# Altium PCB myESR.PcbDoc
Units mm, origin at the board's own origin, x right, y up, seen from the top; angles counter-clockwise.
Board outline 92.58 x 84.33 mm, 2 copper layers (Top Layer, Bottom Layer); 67 components, 49 nets, 231 pads, 4 vias.
Unrouted connection lines stored in the file: 1.
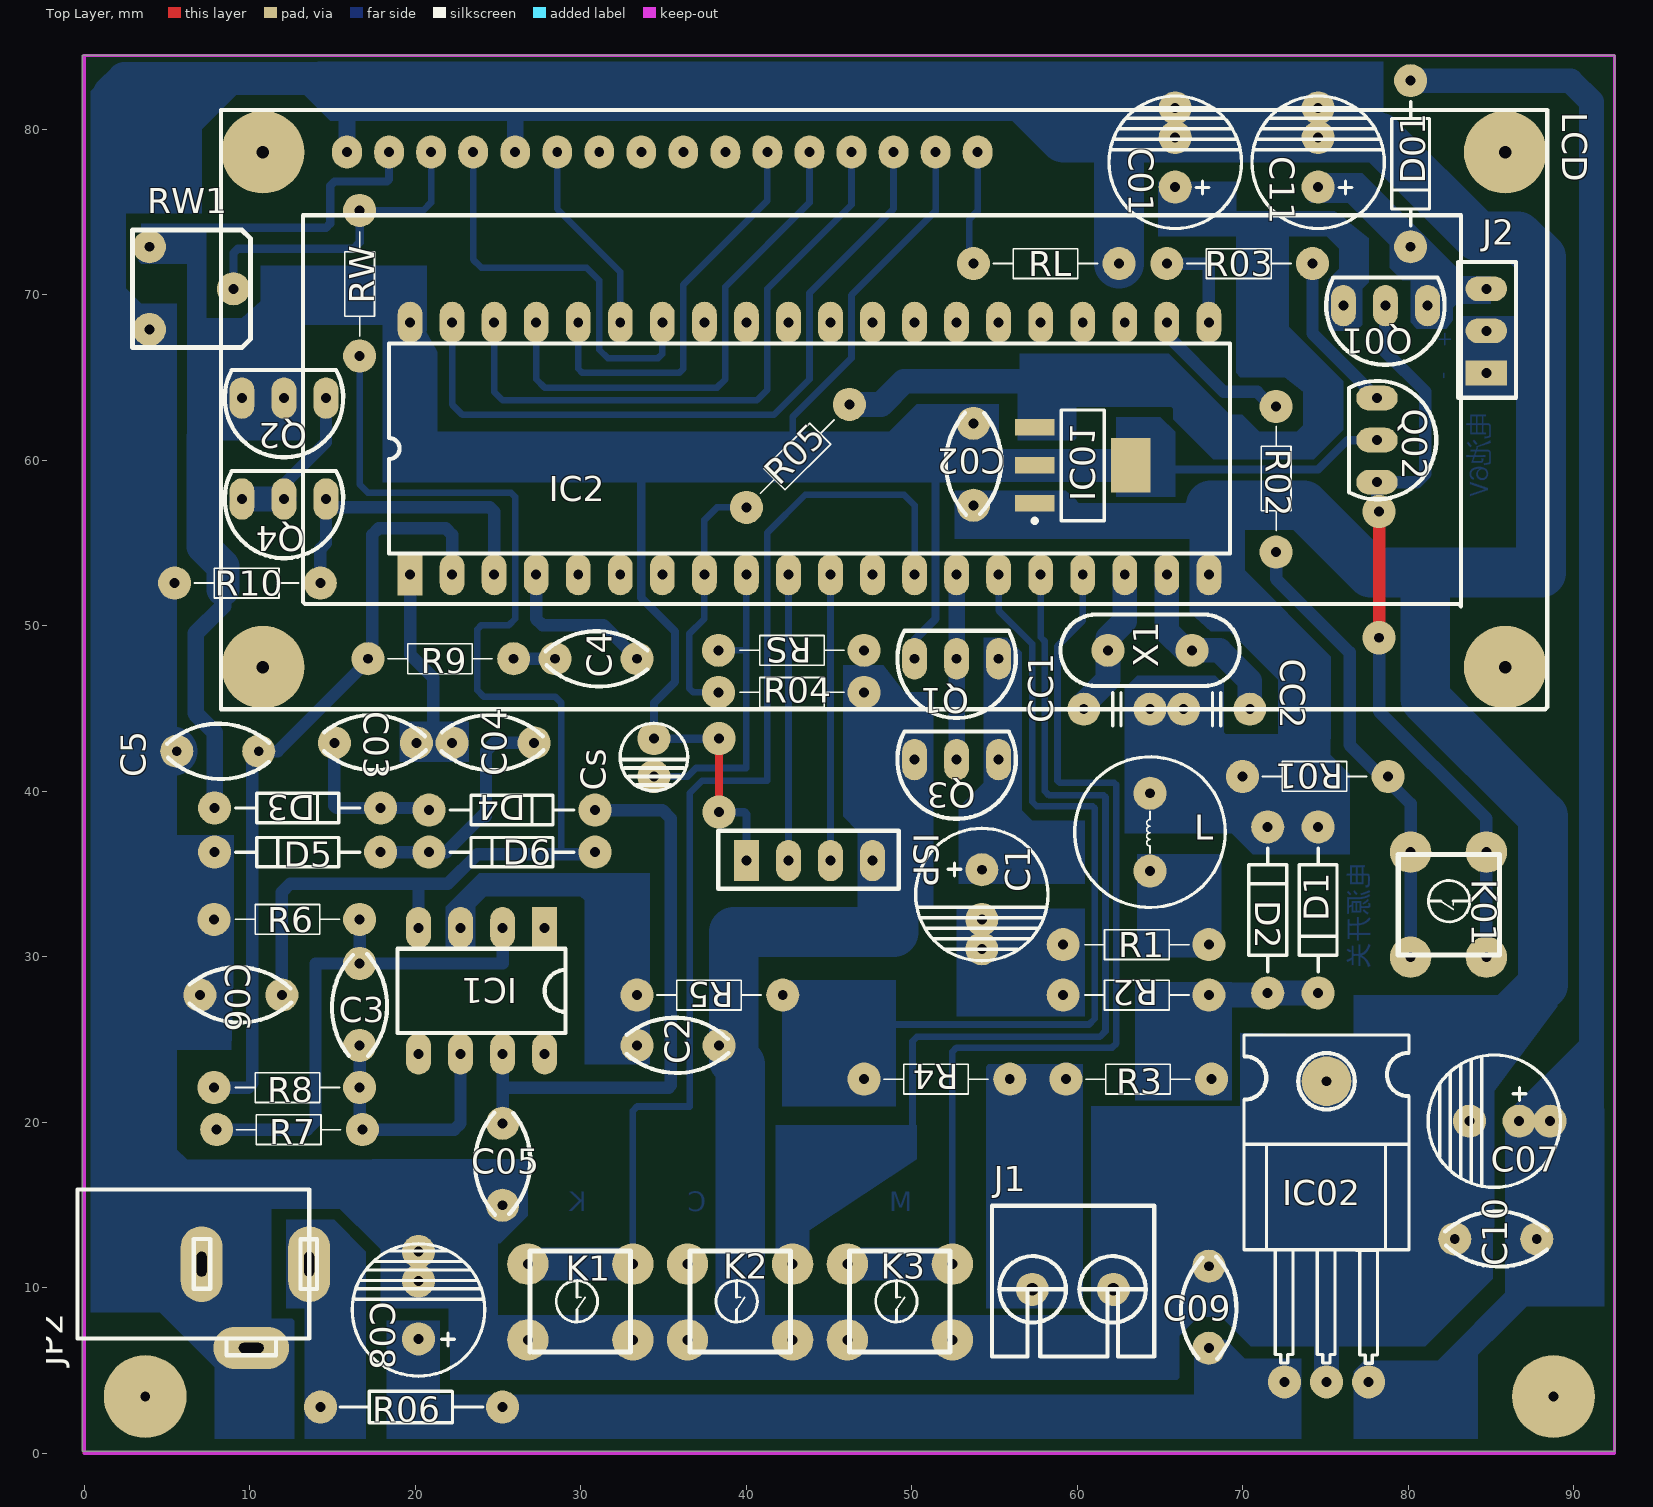
[diagram p0: Top Layer view]
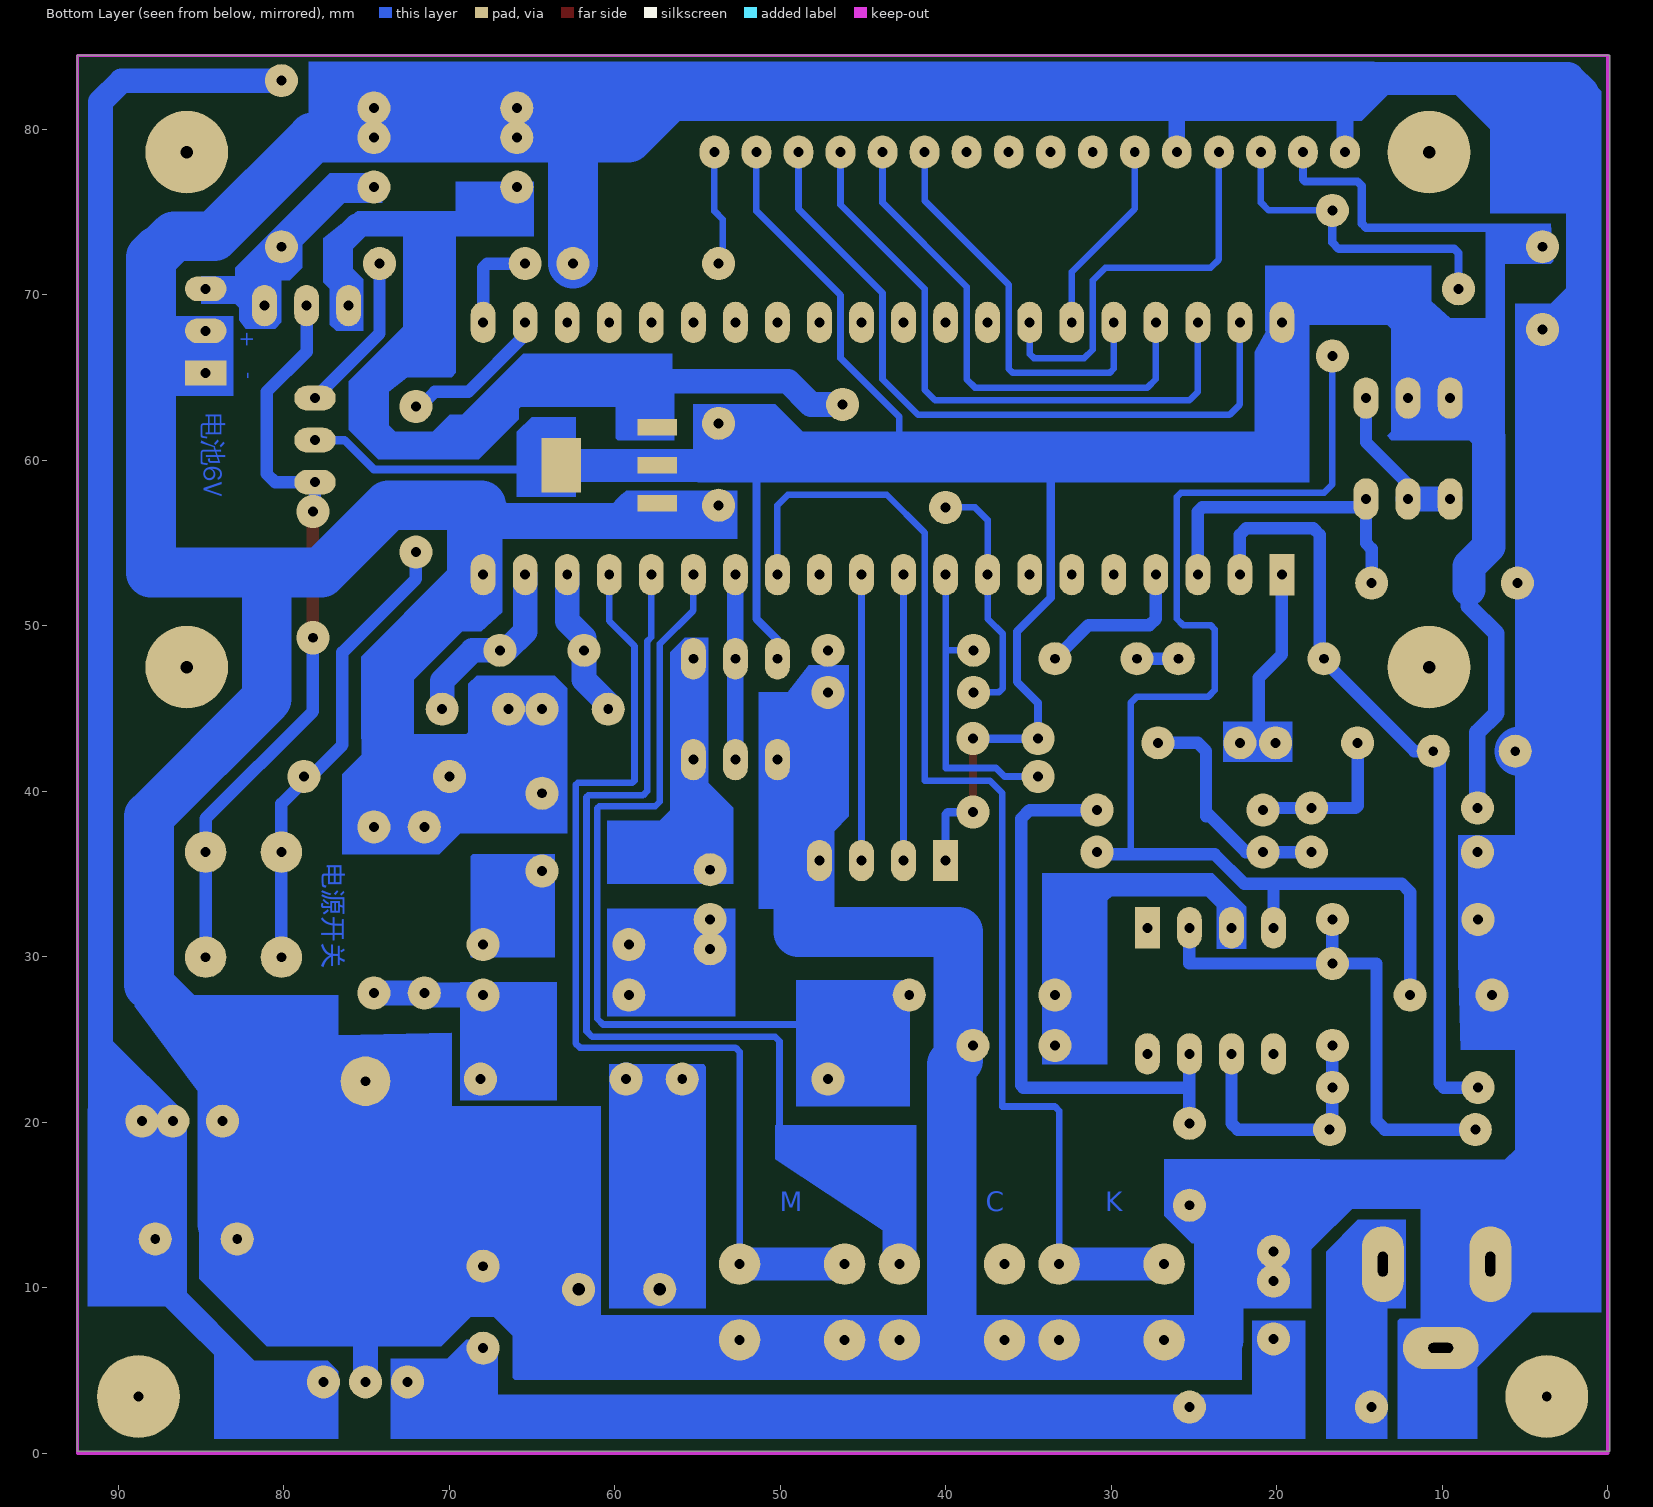
[diagram p1: Bottom Layer view, seen from below]

## Layer stack, top to bottom
Top Layer: signal copper 0.0356
Dielectric: dielectric 0.32, FR-4, Dk 4.8
Bottom Layer: signal copper 0.0356

## Board outline
-0.127,84.455 92.456,84.455 92.456,0.127 -0.127,0.127 -0.127,84.455

## Design rules (kind name [scope] priority, off if disabled: settings)
Clearance [All] p1: gap=0.254
ComponentClearance [All] p1: gap=0.254 collisioncheckmode=3 verticalgap=0.254
PolygonConnect [All] p1: connectstyle=Relief reliefconductorwidth=0.254 reliefentries=4 polygonreliefangle="90 Angle"
RoutingVias [All] p1: holewidth=0.6 width=2 viastyle="Through Hole" minholewidth=0.6 minwidth=2 maxholewidth=0.6 maxwidth=2
SolderMaskExpansion [All] p1: expansion=0.102
TestPointUsage [All] p1: valid=0 allowmultiple=FALSE
Testpoint [All] p1: side=15 testpointundercomponent=TRUE minsize=1.016 maxsize=2.54 preferedsize=1.524 minholesize=0 maxholesize=1.016 preferedholesize=0.813 testpointgrid=0.025 style=1023 order=0123456789
Width [All] p1: maxlimit=3 minlimit=0.254 preferedwidth=0.4
18 further rules are at their usual default settings.

## Components (designator, comment, footprint, x,y, rotation, side; value= is the part's Value field where it differs from the comment)
C1 "100uF" 电解3/8 54.229,32.258 r90 top
C01 "100uF" 电解3/8 65.913,79.502 r270 top
C2 "104" 电容4.953 33.401,24.638 r270 top
C02 "104" 电容4.953 53.721,62.23 r180 top
C3 "104" 电容4.953 16.637,24.638 r0 top
C03 "104" 电容4.953 15.113,42.926 r270 top
C4 "10n" 电容4.953 33.401,48.006 r90 top
C04 "104" 电容4.953 22.225,42.926 r270 top
C5 "104" 电容4.953 10.541,42.418 r90 top
C05 "104" 电容4.953 25.273,19.939 r180 top
C06 "104" 电容4.953 6.985,27.686 r270 top
C07 "100uF" 电解3/8 83.693,20.066 r0 top
C08 "470uF" 电解3.5/8 20.193,10.414 r270 top
C09 "104" 电容4.953 67.945,6.35 r0 top
C10 "104" 电容4.953 87.757,12.954 r90 top
C11 "100uF" 电解3/8 74.549,79.502 r270 top
CC1 "22P" 高频电容 64.389,44.958 r180 top
CC2 "22P" 高频电容 66.421,44.958 r0 top
Cs "10uF" 电解10uF 34.417,40.894 r90 top
D1 "IN4007" IN4007 74.549,27.813 r90 top
D01 "IN4007" IN4007 80.137,72.898 r90 top
D2 "IN4007" IN4007 71.501,37.846 r270 top
D3 "IN60" 1/4ZD-4148 17.907,38.989 r180 top
D4 "IN60" 1/4ZD-4148 30.861,38.862 r180 top
D5 "IN60" 1/4ZD-4148 7.874,36.322 r0 top
D6 "IN60" 1/4ZD-4148 20.828,36.322 r0 top
IC1 "OP07" 8脚集成 27.813,31.75 r180 top
IC01 "AMS1117 3.3" SOT230 60.325,59.69 r0 top
IC2 "STC12LE5A60S2" 89S52DIP40 19.685,53.086 r90 top locked
IC02 "7806" TO-220 72.517,4.318 r0 top
ISP "下载线" IDC4 40.005,35.814 r0 top
J1 "CX" 接线端子=2 57.277,9.906 r0 top
J2 "IN 6V" IDC3 84.709,65.278 r90 top
JP2 "POWER-DC 3.5" POWER-AC 13.589,11.43 r180 top
K1 "K" 微动开关 26.797,6.858 r0 top
K01 "SW" 微动开关 80.137,36.322 r270 top
K2 "C" 微动开关 36.449,6.858 r0 top
K3 "M" 微动开关 46.101,6.858 r0 top
L "4.7MH" 磁芯电感4.7X9.1 64.389,39.878 r270 top
LCD "LCD1602A" LCD1602 10.795,47.498 r0 top locked
Q1 "8050" TO92C 52.705,48.006 r180 top
Q01 "8550" TO92C 78.613,69.342 r180 top
Q2 "8050" TO92C 12.065,63.754 r180 top
Q02 "8050" TO92C 78.105,61.214 r270 top
Q3 "8550" TO92C 52.705,41.91 r180 top
Q4 "8050" TO92C 12.065,57.658 r180 top
R1 "100" 1/4电阻11 67.945,30.734 r180 top
R01 "5.1K" 1/4电阻11 69.977,40.894 r0 top
R2 "82" 1/4电阻11 67.945,27.686 r180 top
R02 "5.1K" 1/4电阻11 72.009,63.246 r270 top
R3 "18" 1/4电阻11 59.309,22.606 r0 top
R03 "5.1K" 1/4电阻11 65.405,71.882 r0 top
R4 "10K" 1/4电阻11 47.117,22.606 r0 top
R04 "51K" 1/4电阻11 47.117,45.974 r180 top
R5 "10K" 1/4电阻11 33.401,27.686 r0 top
R05 "100K" 1/4电阻11 40.005,57.15 r45 top
R06 "10" 1/2W电阻 25.273,2.794 r180 top
R6 "1K" 1/4电阻11 16.637,32.258 r180 top
R7 "51K" 1/4电阻11 8.001,19.558 r0 top
R8 "10K" 1/4电阻11 16.637,22.098 r180 top
R9 "100K" 1/4电阻11 17.145,48.006 r0 top
R10 "10K" 1/4电阻11 5.461,52.578 r0 top
RL "200" 1/4电阻11 53.721,71.882 r0 top
RS "2.2K" 1/4电阻11 47.117,48.514 r180 top
RW "3.3K*" 1/4电阻11 16.637,66.294 r90 top
RW1 "5K" VR 3.937,72.898 r270 top
X1 "18.432MHz" 晶振 66.929,48.514 r180 top

## Footprints (in the part's own frame and the unit in brackets; to place one, negate y for a bottom-side part, rotate by r counter-clockwise, add the part's x,y. Pads: shape width x height; smd on the part's side, far side on the other; paste and mask are expansions set on the pad)
1/2W电阻 [mm] "常用电阻"
  round 2 hole 0.6: 1(0,0) 2(11,0)
  silkscreen extent 1.2,-0.95 9.82,0.95
1/4ZD-4148 [mm]
  round 2 hole 0.6: 1(0,0) 2(10.033,0)
  silkscreen extent 1.27,-0.89 8.76,0.89
1/4电阻11 [mm]
  round 2 hole 0.6: 1(0,0) 2(8.8,0)
  silkscreen extent 1.2,-0.9 7.5,0.9
8脚集成 [mm] "IC"
  rect 1.5x2.5 hole 0.6: 1(0,0)
  oval 1.5x2.5 hole 0.6: 2(2.54,0) 3(5.08,0) 4(7.62,0) 5(7.62,7.62) 6(5.08,7.62) 7(2.54,7.62) 8(0,7.62)
  silkscreen extent -1.27,1.27 8.89,6.35
89S52DIP40 [mm]
  rect 2.5x1.5 hole 0.6: 1(0,0)
  oval 2.5x1.5 hole 0.6: 2(0,-2.54) 3(0,-5.08) 4(0,-7.62) 5(0,-10.16) 6(0,-12.7) 7(0,-15.24) 8(0,-17.78) 9(0,-20.32) 10(0,-22.86) 11(0,-25.4) 12(0,-27.94) 13(0,-30.48) 14(0,-33.02) 15(0,-35.56) 16(0,-38.1) 17(0,-40.64) 18(0,-43.18) 19(0,-45.72) 20(0,-48.26) 21(15.24,-48.26) 22(15.24,-45.72) 23(15.24,-43.18) 24(15.24,-40.64) 25(15.24,-38.1) 26(15.24,-35.56) 27(15.24,-33.02) 28(15.24,-30.48) 29(15.24,-27.94) 30(15.24,-25.4) 31(15.24,-22.86) 32(15.24,-20.32) 33(15.24,-17.78) 34(15.24,-15.24) 35(15.24,-12.7) 36(15.24,-10.16) 37(15.24,-7.62) 38(15.24,-5.08) 39(15.24,-2.54) 40(15.24,0)
  silkscreen extent 1.27,-49.53 13.97,1.27
IDC3 [mm]
  rect 1.5x2.5 hole 0.6: 1(0,0)
  oval 1.5x2.5 hole 0.6: 2(2.54,0) 3(5.08,0)
  silkscreen extent -1.5,-1.8 6.7,1.7
IDC4 [mm]
  rect 1.5x2.5 hole 0.6: 1(0,0)
  oval 1.5x2.5 hole 0.6: 2(2.54,0) 3(5.08,0) 4(7.62,0)
  silkscreen extent -1.7,-1.7 9.2,1.8
IN4007 [mm]
  round 2 hole 0.6: 1(0,0) 2(10.033,0)
  silkscreen extent 1.27,-1.14 8.76,1.14
LCD1602 [mm]
  oval 1.8x2 hole 0.6: 1(5.08,31.115) 2(7.62,31.115) 3(10.16,31.115) 4(12.7,31.115) 5(15.24,31.115) 6(17.78,31.115) 7(20.32,31.115) 8(22.86,31.115) 9(25.4,31.115) 10(27.94,31.115) 11(30.48,31.115) 12(33.02,31.115) 13(35.56,31.115) 14(38.1,31.115) 15(40.64,31.115) 16(43.18,31.115)
  round 5 hole 0.762: ""(0,0) ""(0,31.115) ""(75.057,0) ""(75.057,31.115)
  silkscreen extent -2.54,-2.54 77.6,33.66
POWER-AC [mm]
  oval 2.54x4.572 hole 0.6 slot 1.5 at 90 deg: 1(0,0) 2(6.5,0)
  oval 4.572x2.54 hole 0.6 slot 1.5 at 0 deg: 3(3.5,5.064)
  silkscreen extent -0.47,-4.5 14,5.5
SOT230 [mm]
  rect 2.4x1 all layers, no hole: 1(-2.9,-2.3) 2(-2.9,0) 3(-2.9,2.3)
  rect 2.4x3.3 all layers, no hole: 4(2.9,0)
  silkscreen extent -3.02,-3.47 1.3,3.35
TO92C [mm]
  oval 1.5x2.5 hole 0.6: 1(0,0) 2(2.54,0) 3(-2.54,0)
  silkscreen extent -3.58,-1.7 3.58,3.58
TO-220 [mm]
  round 2 hole 0.6: 1(0,0) 2(2.54,0) 2(2.54,0) 3(5.08,0)
  round 3 hole 0.6: 3(2.54,18.161)
  silkscreen extent -2.44,1.12 7.52,20.95
VR [mm]
  round 2 hole 0.6: 1(0,0) 2(2.54,5.08) 3(5,0)
  silkscreen extent -1.02,-1.02 6.1,6.1
微动开关 [mm]
  round 2.5 hole 0.6: 1(0,0) 1(6.35,0) 2(0,4.572) 2(6.35,4.572)
  silkscreen extent 0.14,-0.75 6.22,5.37
接线端子=2 [mm]
  round 2 hole 0.762: 1(0,0) 2(4.9,0)
  silkscreen extent -2.44,-4.06 7.37,5.05
晶振 [mm]
  round 2 hole 0.6: 1(0,0) 2(5.08,0)
  silkscreen extent -2.87,-2.16 7.95,2.16
电容4.953 [mm]
  round 2 hole 0.6: 1(0,0) 2(0,4.953)
  silkscreen extent -1.68,-0.63 1.66,5.53
电解3.5/8 [mm]
  round 2 hole 0.6: 1(0,0) 2(3.5,0)
  silkscreen extent -2.25,-4 5.75,4
电解3/8 [mm]
  round 2 hole 0.6: 1(0,0) 2(3,0)
  silkscreen extent -2.5,-4 5.5,4
电解10uF [mm]
  round 2 hole 0.6: 1(0,0) 2(2.286,0)
  silkscreen extent -0.87,-2.04 3.21,2.04
磁芯电感4.7X9.1 [mm]
  round 2 hole 0.6: 1(0,0) 2(4.7,0)
  silkscreen extent -2.2,-4.55 6.9,4.55
高频电容 [mm]
  round 2 hole 0.6: 1(0,0) 2(4,0)
  silkscreen extent 1.13,-1 2.88,1

## Part data
C1 C01 C07 C08 C11 Cs: library part 电解电容
C2 C02 C3 C03 C4 C04 C5 C05 C06 C09 C10 CC1 CC2: library part 无极性电容
D1 D01 D2 D3 D4 D5 D6: library part 二极管
IC2: library part AT89S5X
IC02: library part 78XX
ISP: library part CON4, "Connector"
J1: library part CON2, "Connector"
J2: library part CON3, "Connector"
K1 K01 K2 K3: library part 微动开关
L: library part 电感
LCD: library part LCD1602, "LCD"
Q1 Q2 Q02 Q4: library part NPN
Q01 Q3: library part PNP
R1 R01 R2 R02 R3 R03 R4 R04 R5 R05 R06 R6 R7 R8 R9 R10 RL RS RW: library part 电阻
RW1: library part VR
X1: library part 晶振

## Free pads (board coordinates)
  round 2 hole 0.6: 0(20.193,12.192) 0(38.354,43.18) 1(38.354,38.735) 1(88.558,20.066) 2(54.229,30.48) 2(78.232,56.896) 3(65.913,81.28) 3(78.232,49.276) 4(74.549,81.28)
  round 5 hole 0.6: ""(3.683,3.429) ""(88.773,3.429)

## Via types
v1: diameter 2, hole 0.6, Top Layer to Bottom Layer, 4 vias

## Nets (pads, with @x,y where several pads share a name; then routed paths per layer and width w, separated by ;. In a path a pad name is that pad's centre, name@x,y a point inside that pad or via, vN(x,y) a via of type N, cw(c..) or ccw(c..) an arc to the next point about the centre after c; other vN are vias at no path point)
3.3V: C02.1 Cs.2 D3.2 IC01.2 IC01.4 IC2.40 ISP.1 LCD.2 LCD.15 pad.0@38.354,43.18 pad.1@38.354,38.735 Q1.2 Q2.1 Q02.1 Q2.2 RW1.1 | length 212.9
  Top Layer w0.5: v1(38.354,43.18) 38.354,38.862 pad.1@38.481,38.735
  Bottom Layer w0.4: 42.799,59.69 42.799,62.611 46.355,66.167 46.355,69.977 51.435,75.057 LCD.15
  Bottom Layer w0.5: RW1.1 6.096,72.898 6.477,72.517 ; 6.477,60.833 6.477,73.787 6.731,74.041 14.605,74.041 14.859,74.295 14.859,76.581 15.113,76.835 18.288,76.835 18.415,76.962 LCD.2 ; 33.655,59.69 33.655,51.689 35.687,49.657 35.687,46.609 34.417,45.339 Cs.2 v1(38.354,43.18) ; v1(38.354,38.735) 39.878,38.735 40.005,38.608 ISP.1 ; Q1.2 50.165,49.149 51.435,50.419 51.435,59.69 ; IC01.4 63.479,59.436 74.549,59.436 76.327,61.214 Q02.1
  Bottom Layer w1: D3.2 7.874,43.561 6.731,44.704 6.731,49.53 8.382,51.181 8.382,52.197
  Bottom Layer w2: 8.382,52.197 8.382,53.594 7.189,54.787 7.189,61.418 Q2.2 11.811,63.754 11.811,70.104 12.065,70.358 19.177,70.358 19.685,69.85 19.685,60.706 20.701,59.69 IC01.4@63.119,59.69 ; 53.721,59.69 C02.1
GND: C01.1 C2.2 C02.2 C05.2 C5.2 C06.1 C07.1 C08.1 C09.2 C10.2 C11.1 CC1.1 CC2.1 D1.2 D2.1 D5.1 IC01.1 IC02.2 IC02.3@75.057,22.479 IC2.20 ISP.4 J1.2 J2.1 J2.2 JP2.2 JP2.3 K1.1 K2.1 K3.1 L.1 LCD.1 LCD.5 pad.0@20.193,12.192 pad.3@65.913,81.28 pad.4 Q3.2 R01.1 R04.1 R6.2 R10.1 RL.2 RS.1 RW1.3 | length 508.2
  Bottom Layer w1: 4.064,27.559 4.191,27.686 C06.1 ; 4.064,32.258 R6.2 ; 4.064,36.322 D5.1 ; 4.064,52.705 4.191,52.578 ; LCD.1 15.875,81.534 16.383,82.042 ; LCD.5 26.035,82.042
  Bottom Layer w1.5: R04.1@47.117,46.482 48.006,46.482 48.895,45.593 48.895,45.085 ; 47.625,32.258 47.498,32.258 47.625,32.385 ; 48.133,41.91 Q3.2 ; C02.2 53.834,57.39 IC01.1 ; IC01.1@57.425,57.404 58.829,57.404 59.069,57.39 59.817,56.642 67.945,56.642 ; CC1.1@64.389,45.085 CC2.1@66.421,45.085 ; IC02.2@75.057,4.318 75.057,11.303
  Bottom Layer w2: RW1.3@3.222,67.898 1.524,69.596 1.524,82.169 2.413,83.058 14.732,83.058 15.748,82.042
  Bottom Layer w3: 4.064,42.418 C5.2@5.334,42.418 ; RW1.3@4.064,67.898 4.064,17.78 5.588,16.256 17.526,16.256 18.796,14.986 C05.2 ; 7.239,16.256 7.089,16.106 7.089,9.366 JP2.3 JP2.3@10.089,6.604 ; JP2.3@9.851,6.604 JP2.3@10.414,6.604 ; 15.748,82.042 56.642,82.042 59.182,79.502 78.232,79.502 84.201,73.533 86.614,73.533 87.51,72.637 87.637,72.637 88.011,72.263 88.011,53.213 77.724,53.213 73.66,57.277 68.072,57.277 68.072,57.023 67.945,56.896 68.453,56.388 68.453,52.578 73.787,47.244 73.787,41.529 73.025,40.767 ; C08.1 23.495,10.414 ; 23.495,14.986 23.495,6.858 61.595,6.858 62.357,7.62 62.357,10.086 63.574,11.303 81.153,11.303 83.693,13.843 83.693,23.876 88.138,28.321 88.138,38.481 81.026,45.593 81.026,53.213 ; 39.624,6.858 39.624,23.495 39.243,23.749 39.243,31.496 48.895,31.496 48.895,44.577 ; RL.2 62.521,78.904 63.119,79.502 ; CC1.1 L.1 69.088,39.878 69.977,40.767 73.025,40.767 ; D2.1 D1.2 74.041,38.354 74.041,41.148 ; 73.025,38.354 73.025,40.767 ; 75.057,11.303 IC02.3@75.057,22.479
NetC1_1: C1.1 pad.2@54.229,30.48 R1.2 R2.2 | length 9.1
  Bottom Layer w1.5: C1.1 54.229,31.369 54.864,30.734 R1.2 R2.2
NetC1_2: C1.2 Q1.3 Q3.3 | length 13.2
  Bottom Layer w1: C1.2 54.229,37.465 55.245,38.481 Q1.3
NetC01_2: C01.2 IC01.3 Q01.2 R05.2 | length 68.9
  Bottom Layer w1: IC01.3 57.425,62.738 ; 71.827,73.986 71.882,74.041 75.692,74.041
  Bottom Layer w1.5: R05.2 48.133,63.373 49.53,64.77 65.151,64.77 69.088,60.833 73.406,60.833 74.803,62.23 74.803,64.135 71.374,67.564 71.374,74.295 ; IC01.3@57.404,62.011 57.404,64.77 ; C01.2 65.913,75.057 66.675,74.295 75.15,74.295 ; 75.565,74.168 76.835,72.898 76.835,71.374 76.073,70.612 Q01.2
NetC2_1: C2.1 IC1.3 R5.1 | length 21.6
  Bottom Layer w0.75: IC1.3 22.733,32.639 24.384,34.29 32.893,34.29 33.401,33.782 C2.1
NetC3_1: C3.1 IC1.6 R7.2 R8.1 | length 15.9
  Bottom Layer w0.75: R7.2@16.637,19.722 C3.1 ; R8.1 R8.1@16.801,21.934 ; R7.2@16.801,19.05 R7.2 22.352,19.558 22.733,19.939 IC1.6
NetC03_1: C03.1 D3.1 D4.2 | length 9.6
  Bottom Layer w0.75: C03.1 15.113,39.116 15.24,38.989 20.701,38.989 D4.2
NetC3_2: C3.2 IC1.2 R6.1 R7.1 | length 32.2
  Bottom Layer w0.75: R7.1 13.462,19.558 13.97,20.066 13.97,29.591 25.273,29.591 ; C3.2 R6.1@16.637,32.766 ; 25.273,29.718 IC1.2
NetC4_2: C4.2 R9.2 | length 2.5
  Bottom Layer w0.75: R9.2 C4.2
NetC04_2: C04.2 D5.2 D6.1 | length 14.4
  Bottom Layer w0.75: D5.2 21.859,36.322 24.272,38.735 ; 24.272,38.496 24.272,42.433 24.765,42.926 C04.2
NetC07_2: C07.2 C10.1 D01.2 IC02.3@77.597,4.318 pad.1@88.558,20.066 | length 99.9
  Bottom Layer w1.5: IC02.3@77.343,4.318 81.534,4.318 87.503,10.287 87.503,19.256 C07.2 90.678,20.066 91.059,20.447 91.059,81.661 89.789,82.931 D01.2
NetC08_2: C08.2 C09.1 IC02.1 R06.1 | length 60.6
  Bottom Layer w1.5: C08.2 20.193,2.794 70.993,2.794 IC02.1 ; 67.945,2.794 C09.1
NetC11_2: C11.2 D01.1 J2.3 Q01.3 | length 14.4
  Bottom Layer w1: C11.2 76.152,76.502 81.153,71.501 Q01.3 ; Q01.3@81.153,70.485 81.28,70.358 J2.3
NetCC1_2: CC1.2 IC2.18 X1.2 | length 9.1
  Bottom Layer w1.5: CC1.2@60.23,45.117 61.849,46.736 61.849,49.276 62.865,50.292 IC2.18
NetCC2_2: CC2.2 IC2.19 X1.1 | length 11.4
  Bottom Layer w1.5: IC2.19 65.405,49.657 66.548,48.514 68.58,48.514 70.421,46.673 CC2.2
NetCs_1: Cs.1 IC2.9 RS.2 | length 19.2
  Bottom Layer w0.4: Cs.1 36.449,40.894 36.957,41.402 40.005,41.402 IC2.9 ; RS.2 40.005,48.514
NetD1_1: D1.1 D2.2 R2.1 R3.2 | length 11.7
  Bottom Layer w1.5: R3.2@67.945,22.606 R2.1 71.374,27.686 D2.2 D1.1
NetIC2_13: IC2.13 K1.2 | length 72.4
  Bottom Layer w0.4: K1.2@33.147,11.43 33.147,20.701 33.401,20.955 36.576,20.955 36.576,39.878 37.338,40.64 41.275,40.64 41.275,55.626 43.561,57.912 49.53,57.912 50.165,57.277 IC2.13
  Bottom Layer w2: K1.2@26.797,11.43 K1.2@33.147,11.43
NetIC2_16: IC2.16 K2.2 | length 63.5
  Bottom Layer w0.4: K2.2@42.799,11.43 42.799,18.796 43.053,19.05 49.784,19.05 50.038,19.304 50.038,24.892 50.311,25.165 61.36,25.165 61.703,25.508 61.703,39.643 61.595,39.751 58.293,39.751 58.039,40.005 58.039,49.054 57.785,49.308 IC2.16
NetIC2_17: IC2.17 K3.2 | length 61.7
  Bottom Layer w0.4: K3.2@52.451,11.43 52.451,24.257 52.705,24.511 62.103,24.511 62.357,24.765 62.357,40.386 62.23,40.513 58.928,40.513 58.801,40.64 58.801,48.768 60.325,50.292 IC2.17
  Bottom Layer w2: K3.2@46.101,11.43 K3.2@52.451,11.43
NetIC2_34: IC2.34 LCD.4 | length 24.8
  Bottom Layer w0.4: LCD.4 23.495,72.136 24.003,71.628 30.353,71.628 31.115,70.866 31.115,66.675 31.623,66.167 34.671,66.167 34.925,66.421 IC2.34
NetIC2_35: IC2.35 LCD.6 | length 11.9
  Bottom Layer w0.4: LCD.6 28.575,75.184 32.385,71.374 IC2.35
NetIC2_36: IC2.36 LCD.11 | length 24.5
  Bottom Layer w0.4: IC2.36 29.845,65.532 30.099,65.278 35.941,65.278 36.195,65.532 36.195,70.612 41.275,75.692 LCD.11
NetIC2_37: IC2.37 LCD.12 | length 31.1
  Bottom Layer w0.4: IC2.37 27.305,64.897 27.813,64.389 38.227,64.389 38.735,64.897 38.735,70.485 43.815,75.565 LCD.12
NetIC2_38: IC2.38 LCD.13 | length 37.6
  Bottom Layer w0.4: IC2.38 24.765,64.135 25.273,63.627 40.64,63.627 41.275,64.262 41.275,70.358 46.355,75.438 LCD.13
NetIC2_39: IC2.39 LCD.14 | length 43.5
  Bottom Layer w0.4: IC2.39 22.225,63.373 22.86,62.738 41.656,62.738 43.815,64.897 43.815,70.104 48.895,75.184 LCD.14
NetJ1_1: J1.1 R3.1 R4.2 | length 16.9
  Bottom Layer w1.5: R4.2 R3.1
  Bottom Layer w2: J1.1 57.277,12.954 59.309,14.986 R3.1
NetJP2_1: JP2.1 R06.2 | length 11.9
  Bottom Layer w1.5: JP2.1 15.875,11.43 16.256,11.049 16.256,4.777 R06.2
NetK01_1: K01.1 R01.2 R02.2 | length 28.1
  Bottom Layer w0.75: R02.2 72.009,52.832 76.454,48.387 76.454,42.799 78.359,40.894 R01.2 78.777,40.603 80.137,39.243 K01.1@80.137,29.972
NetK01_2: K01.2 pad.2@78.232,56.896 pad.3@78.232,49.276 Q01.1 Q02.2 | length 45.7
  Top Layer w0.75: v1(78.232,49.276) v1(78.232,56.896)
  Bottom Layer w0.75: v1(78.232,49.276) 78.232,44.831 84.709,38.354 K01.2@84.709,29.972 ; v1(78.232,56.896) 78.105,57.277 Q02.2 80.518,58.674 81.026,59.182 81.026,64.135 78.613,66.548 Q01.1
NetL_2: L.2 R1.1 | length 7.9
  Bottom Layer w1.5: L.2 67.692,35.178 67.945,34.925 R1.1
NetLCD_3: LCD.3 RW1.2 RW.2 | length 19.5
  Bottom Layer w0.4: RW.2 20.484,75.094 20.955,75.565 LCD.3
  Bottom Layer w0.5: RW1.2 9.017,72.517 9.271,72.771 16.256,72.771 16.637,73.152 RW.2
NetLCD_16: LCD.16 RL.1 | length 6.4
  Bottom Layer w0.4: RL.1@53.467,72.39 53.467,74.549 53.975,75.057 LCD.16
NetQ2_3: Q2.3 Q4.1 Q4.2 | length 9.7
  Bottom Layer w0.75: Q4.1 12.065,58.547 14.605,61.087 Q2.3
  Bottom Layer w1.5: Q4.2 Q4.1
NetQ02_3: Q02.3 R03.2 | length 9.7
  Bottom Layer w0.75: R03.2 74.205,67.654 Q02.3
P1.0: C03.2 C04.1 IC2.1 | length 12.9
  Bottom Layer w0.75: IC2.1 19.685,48.26 21.082,46.863 21.082,42.926 ; C03.2 C04.1
P1.1: C5.1 IC2.2 R8.2 R9.1 | length 47.4
  Bottom Layer w0.75: R8.2@7.837,22.442 R8.2 9.906,22.098 10.16,22.352 10.16,42.418 11.684,42.418 17.399,48.133 17.399,55.499 17.78,55.88 21.844,55.88 22.225,55.499 IC2.2
P1.2: IC2.3 Q4.3 R10.2 | length 19.3
  Bottom Layer w0.75: R10.2 14.261,54.647 14.605,54.991 Q4.3 ; Q4.3@14.605,57.15 24.511,57.15 24.765,56.896 IC2.3
P1.3: C4.1 IC2.4 | length 9.8
  Bottom Layer w0.75: IC2.4 27.305,50.419 27.686,50.038 31.369,50.038 C4.1
P1.7: IC2.8 R04.2 R05.1 | length 15.3
  Bottom Layer w0.4: R04.2 36.8,45.974 36.546,46.228 36.546,49.5 37.465,50.419 37.465,56.388 38.227,57.15 R05.1
P2.0: IC2.21 R03.1 | length 5.9
  Bottom Layer w0.75: R03.1 67.691,71.882 67.945,71.628 IC2.21
P2.1: IC2.22 R02.1 | length 9.2
  Bottom Layer w0.75: IC2.22 65.405,67.564 68.834,64.135 70.866,64.135 71.755,63.246 R02.1
P3.4: IC2.14 Q1.1 Q3.1 | length 11.2
  Bottom Layer w1: Q3.1 IC2.14
P3.5: IC2.15 R4.1 R5.2 | length 54
  Bottom Layer w0.4: 47.117,25.908 60.706,25.908 61.049,26.251 61.049,38.979 60.931,39.097 57.55,39.097 57.277,39.37 57.277,48.895 55.245,50.927 IC2.15@55.245,52.039
  Bottom Layer w1: R5.2 46.736,27.686 47.117,27.305 R4.1
RXD: IC2.11 ISP.3 | length 17.3
  Bottom Layer w0.4: ISP.3 IC2.11
TXD: IC2.10 ISP.2 | length 17.3
  Bottom Layer w0.4: ISP.2 IC2.10
VDD5.5V: C05.1 D4.1 IC1.7 | length 35.3
  Bottom Layer w0.75: C05.1 IC1.7 ; 25.273,22.098 35.306,22.098 35.433,22.225 35.433,38.354 34.925,38.862 D4.1
VSS-2V: C06.2 D6.2 IC1.4 RW.1 | length 73
  Bottom Layer w0.4: RW.1 16.637,58.547 17.145,58.039 25.781,58.039 26.035,57.785 26.035,50.419 25.654,50.038 24.003,50.038 23.749,49.784 23.749,46.101 24.13,45.72 28.448,45.72 28.829,45.339 28.829,36.195
  Bottom Layer w0.75: C06.2 11.938,33.909 12.446,34.417 21.971,34.417 23.749,36.195 D6.2@30.861,36.195 ; 20.193,33.02 20.193,34.29
pads on no net: IC1.1 IC1.5 IC1.8 IC2.5 IC2.6 IC2.7 IC2.12 IC2.23 IC2.24 IC2.25 IC2.26 IC2.27 IC2.28 IC2.29 IC2.30 IC2.31 IC2.32 IC2.33 LCD. LCD.7 LCD.8 LCD.9 LCD.10

## Keep-outs
Keep-Out Layer:
  lines w0.2: 0,0 92.456,0 92.456,84.455 0,84.455 0,0

## Other copper
Bottom Layer:
  region net NetC11_2: 78.867,73.025 78.867,71.628 79.629,70.866 80.137,70.866 80.137,68.326 80.518,67.945 82.296,67.945 82.677,68.453 82.677,71.501 82.55,71.882
  region net NetC01_2: 77.216,70.358 77.216,68.199 76.835,67.818 75.184,67.818 75.184,70.929 75.819,71.564 75.882,71.501 76.327,71.501
  region net GND: 66.802,55.372 66.802,50.8 68.072,49.657 69.215,49.657 72.136,46.736 72.136,43.18 75.311,43.18 75.311,48.133 70.104,53.34 70.104,56.007
  region net GND: 14.097,84.074 78.486,84.074 78.486,80.01 56.769,80.01 56.261,80.518 14.859,80.518 13.208,82.169
  region net GND: 7.874,6.35 7.874,0.889 12.7,0.889 12.7,5.588
  region net NetC07_2: 76.708,0.889 84.201,0.889 84.201,6.35 84.074,6.477 83.185,5.588 77.343,5.588 76.708,4.953
  region net NetC07_2: 85.852,20.447 90.551,25.146 90.551,20.193 90.424,20.066 86.693,20.066
  region net NetC07_2: 91.821,20.828 86.233,20.828 85.852,20.447 85.852,8.89 91.821,8.89
  region net NetC08_2: 18.288,8.001 18.288,0.889 73.533,0.889 73.533,5.715 70.104,5.715 68.961,6.858 67.056,6.858 67.056,3.556 66.929,3.429 21.463,3.429 21.463,8.001
  region net GND: 15.113,15.113 17.907,12.319 17.907,14.986
  region net NetJP2_1: 12.192,8.763 13.335,8.763 13.335,0.889 17.018,0.889 17.018,12.192 15.113,14.097 12.192,14.097
  region net P1.0: 19.05,44.196 19.05,41.783 23.241,41.783 23.241,44.196
  region net 3.3V: 3.302,72.009 3.429,71.882 6.223,71.882 6.223,61.087 6.35,61.214 13.081,61.214 13.335,61.468 13.081,61.722 13.081,68.326 9.779,68.326 9.525,68.58 7.366,68.58 7.366,74.168 7.239,74.295 3.429,74.295
  region net GND: 22.098,8.763 22.098,4.445 66.04,4.445 66.167,4.572 66.167,7.493 22.225,7.493
  region net GND: 3.619,8.509 0.381,8.509 0.381,82.296 2.032,83.947 2.413,83.947 2.413,70.485 3.429,69.469 5.588,69.469 5.588,12.192
  region net GND: 61.341,5.334 66.167,5.334 66.167,7.112 67.31,8.255 68.834,8.255 68.834,10.668 68.453,11.049 62.103,11.049 62.103,7.366 62.039,7.302
  region net 3.3V: 62.357,62.611 62.357,57.785 65.913,57.785 65.913,61.722 65.024,62.611
  region net NetC01_2: 56.388,64.77 59.944,64.77 59.944,61.341 59.817,61.214 56.388,61.214
  region net GND: 52.578,55.245 67.056,55.245 67.056,57.404 60.071,57.404 59.309,58.166 52.578,58.166
  region net 3.3V: 20.32,68.326 18.034,68.326 18.034,58.674 54.991,58.674 55.245,58.928 55.245,63.373 50.292,63.373 48.641,61.722 21.336,61.722 21.336,66.548
  region net 3.3V: 19.685,68.199 13.335,68.199 13.081,67.945 13.081,63.881 9.652,63.881 9.525,63.754 9.525,68.58 10.668,69.596 10.668,71.755 20.701,71.755 20.701,67.818 20.574,67.691
  region net GND: 83.058,68.707 83.058,63.881 87.503,63.881 87.503,68.707
  region net GND: 60.833,8.128 60.833,20.955 69.85,20.955 69.85,25.4 76.708,25.273 76.708,27.686 85.979,27.686 89.027,27.051 84.963,21.59 85.09,21.463 85.09,10.541 81.026,6.477 70.485,6.477 68.072,8.89 61.468,8.89 61.341,8.128
  region net GND: 2.667,17.78 2.667,8.509 4.572,8.509 8.255,4.826 12.7,4.826 12.7,8.001 12.573,8.128 11.303,8.128 11.303,17.272 11.176,17.653
  region net GND: 16.764,13.462 17.907,12.319 17.907,8.763 22.098,8.763 22.098,9.017 24.892,11.811 24.892,12.7 25.146,12.7 26.797,14.351 26.797,17.78 17.399,17.78 16.764,17.018
  region net GND: 62.865,37.465 69.342,37.465 70.612,36.195 76.454,36.195 76.454,41.021 75.184,42.291 75.184,43.434 68.961,43.434 68.834,43.561 68.834,46.482 68.326,46.99 63.627,46.99 62.865,46.228
  region net GND: 45.847,47.625 45.847,38.481 46.736,37.592 46.736,32.893 51.308,32.893 51.308,45.974 49.53,45.974 48.26,47.625
  region net NetJ1_1: 54.483,8.763 60.325,8.763 60.325,23.495 54.61,23.495 54.483,23.368
  region net P3.5: 42.201,27.686 42.164,27.649 42.164,20.955 49.022,20.955 49.022,28.575 42.291,28.575 42.037,28.321 42.164,28.194 42.164,26.67
  region net NetC2_1: 21.844,30.48 21.844,33.02 23.876,35.052 34.163,35.052 34.163,23.495 30.226,23.495 30.226,33.401 29.972,33.655 24.13,33.655 23.622,33.02 23.622,30.48
  region net NetC1_1: 52.705,32.893 52.705,26.416 60.452,26.416 60.452,32.893
  region net NetD1_1: 63.5,28.448 63.5,21.336 69.342,21.336 69.342,28.448
  region net NetL_2: 63.627,36.195 63.627,29.972 68.707,29.972 68.707,36.068 68.58,36.195
  region net NetC1_2: 52.832,34.417 52.832,38.989 54.356,40.513 54.356,49.276 55.753,49.276 56.642,48.387 56.642,38.862 57.277,38.227 60.452,38.227 60.452,34.417
  region net GND: 5.334,24.384 8.89,24.384 9.017,29.718 9.017,37.338 5.461,37.338 5.334,37.211
  region net GND: 2.159,74.93 7.112,74.93 7.112,80.01 9.398,82.296 9.271,82.423 2.413,82.423 2.159,82.169
  region net NetC01_2: 59.69,63.246 65.786,63.246 65.786,62.484 68.199,60.071 74.295,60.071 76.073,61.849 76.073,64.77 72.771,68.072 72.771,73.533 75.057,73.533 75.819,72.771 75.819,70.358 77.216,70.358 77.597,70.739 77.597,73.406 75.565,75.057 69.596,75.057 69.596,65.278 69.85,65.024 72.517,65.024 73.66,64.135 73.66,62.103 73.279,61.722 70.993,61.722 69.977,62.738 69.215,62.738 65.532,66.421 56.515,66.421 56.515,61.468
  region net NetC01_2: 64.897,76.835 64.897,73.533 69.596,73.533 69.596,76.835
  region net NetC11_2: 74.041,77.343 77.216,77.343 82.931,71.628 82.931,71.12 84.963,71.12 84.963,69.469 82.931,69.469 81.788,68.326 80.391,68.326 80.391,70.866 78.867,72.39 78.867,73.025 76.327,75.565 74.041,75.565
  region net NetIC2_16: 41.783,11.303 41.783,19.812 50.292,19.812 50.292,17.78 43.815,13.462 43.815,11.176
  text "+" at 81.534,66.802 h1.5 r270
  text "-" at 81.534,64.897 h1.5 r270
  text "电池6V" at 85.217,62.865 h2 r90
  text "电源开关" at 77.978,35.687 h2 r90
  text "K" at 30.353,14.224 h2
  text "C" at 37.592,14.224 h2
  text "M" at 50.038,14.224 h2

## Silkscreen, mask and mechanical layers (free items; w line width, h text height)
Mechanical 1:
  lines w0.2: 0,0 85.471,0 92.456,0 92.456,3.302 92.456,84.455 0,84.455 0,0